# Altium PCB A40-C2G4A04S2a_3a_pad.pcbdoc
Units mm, origin at the board's own origin, x right, y up, seen from the top; angles counter-clockwise.
Board outline 46.36 x 43.94 mm, 2 copper layers (Top Layer, Bottom Layer); 1 components, 0 nets, 30 pads, 0 vias.
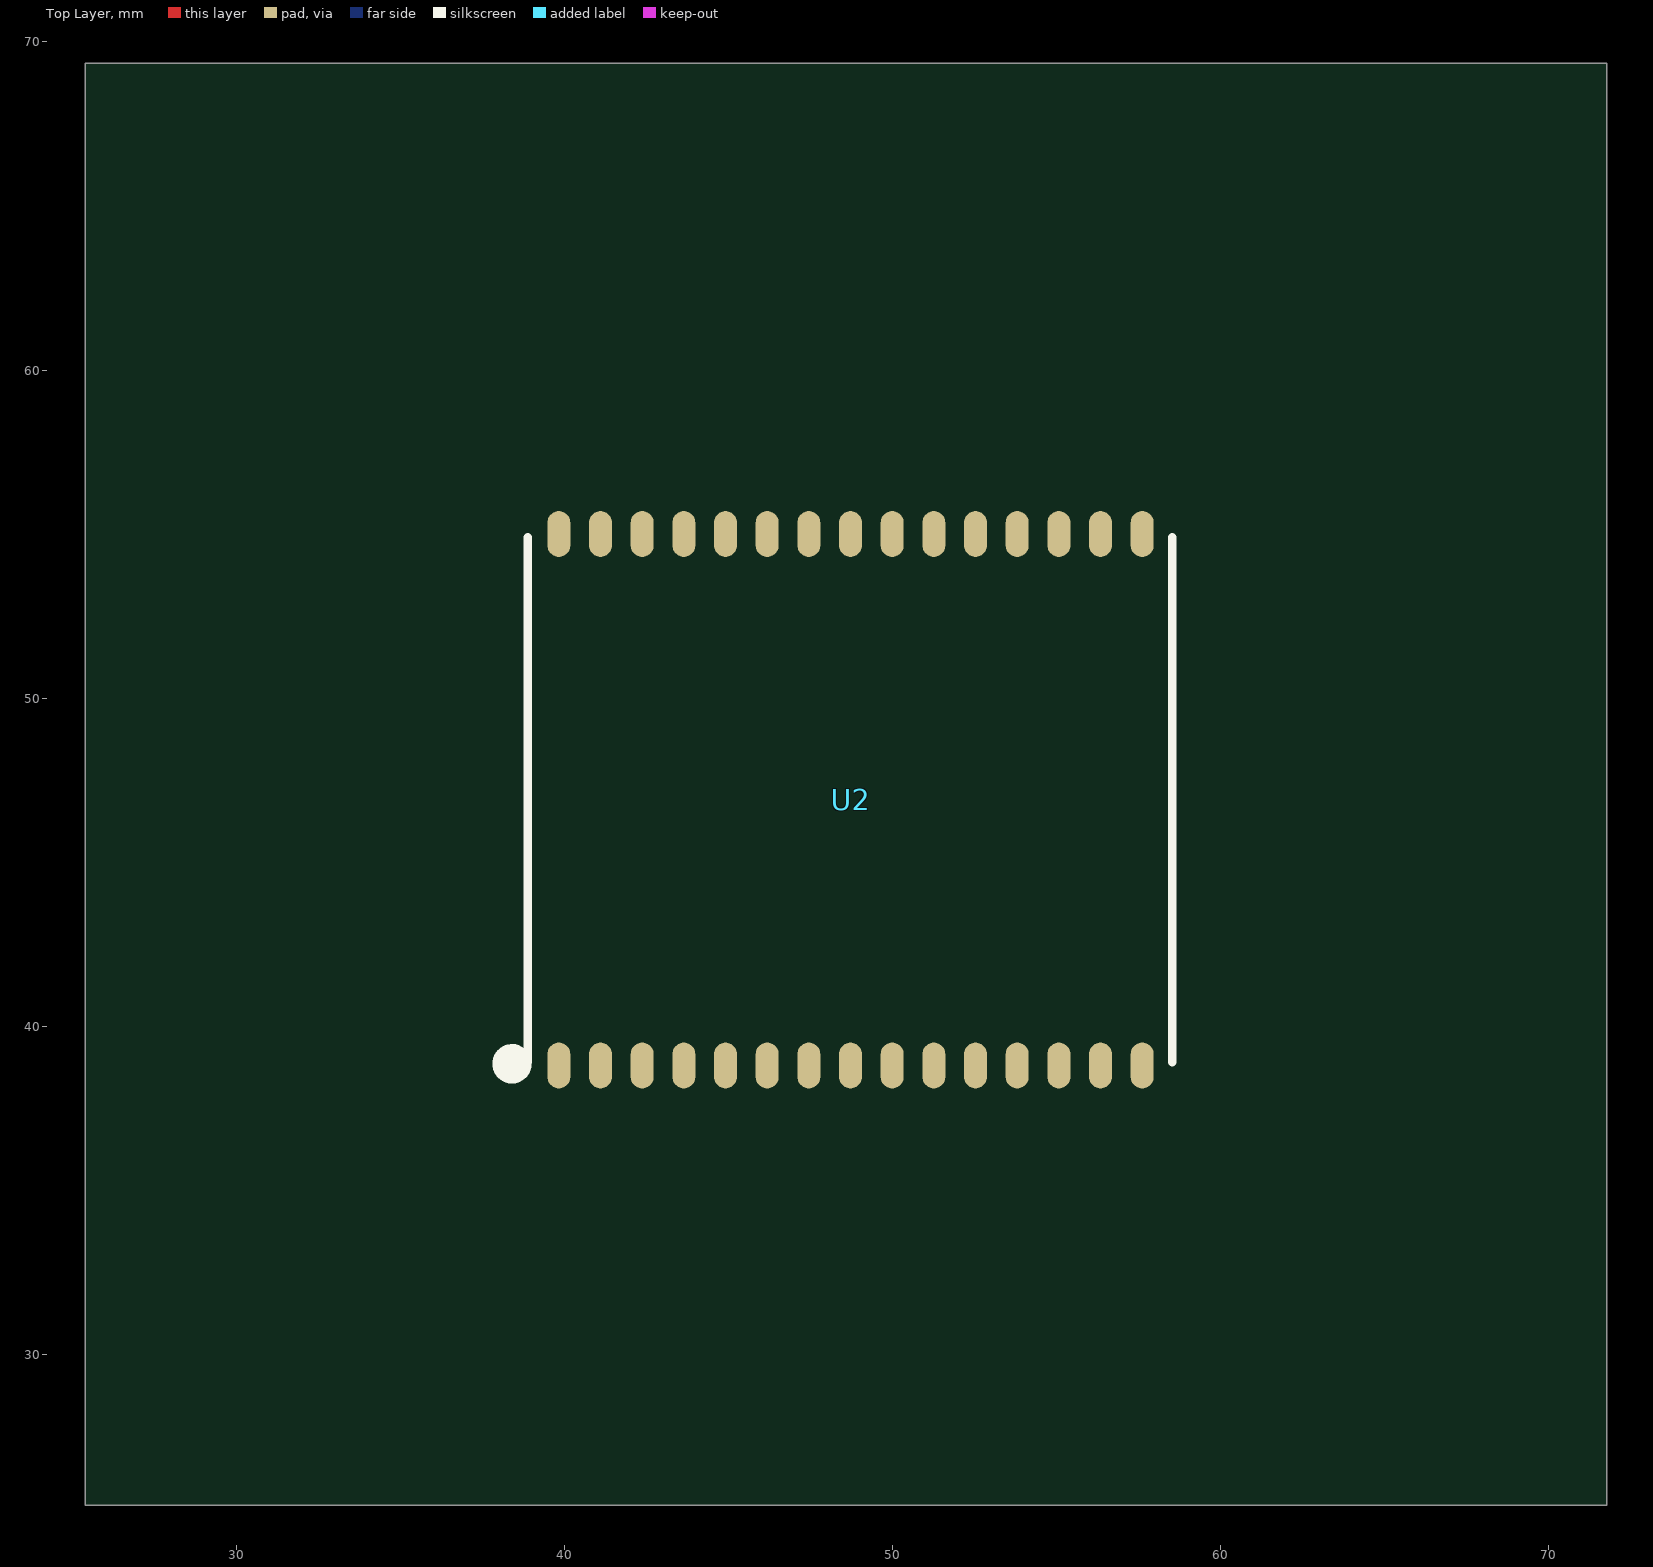
[diagram p0: Top Layer view]
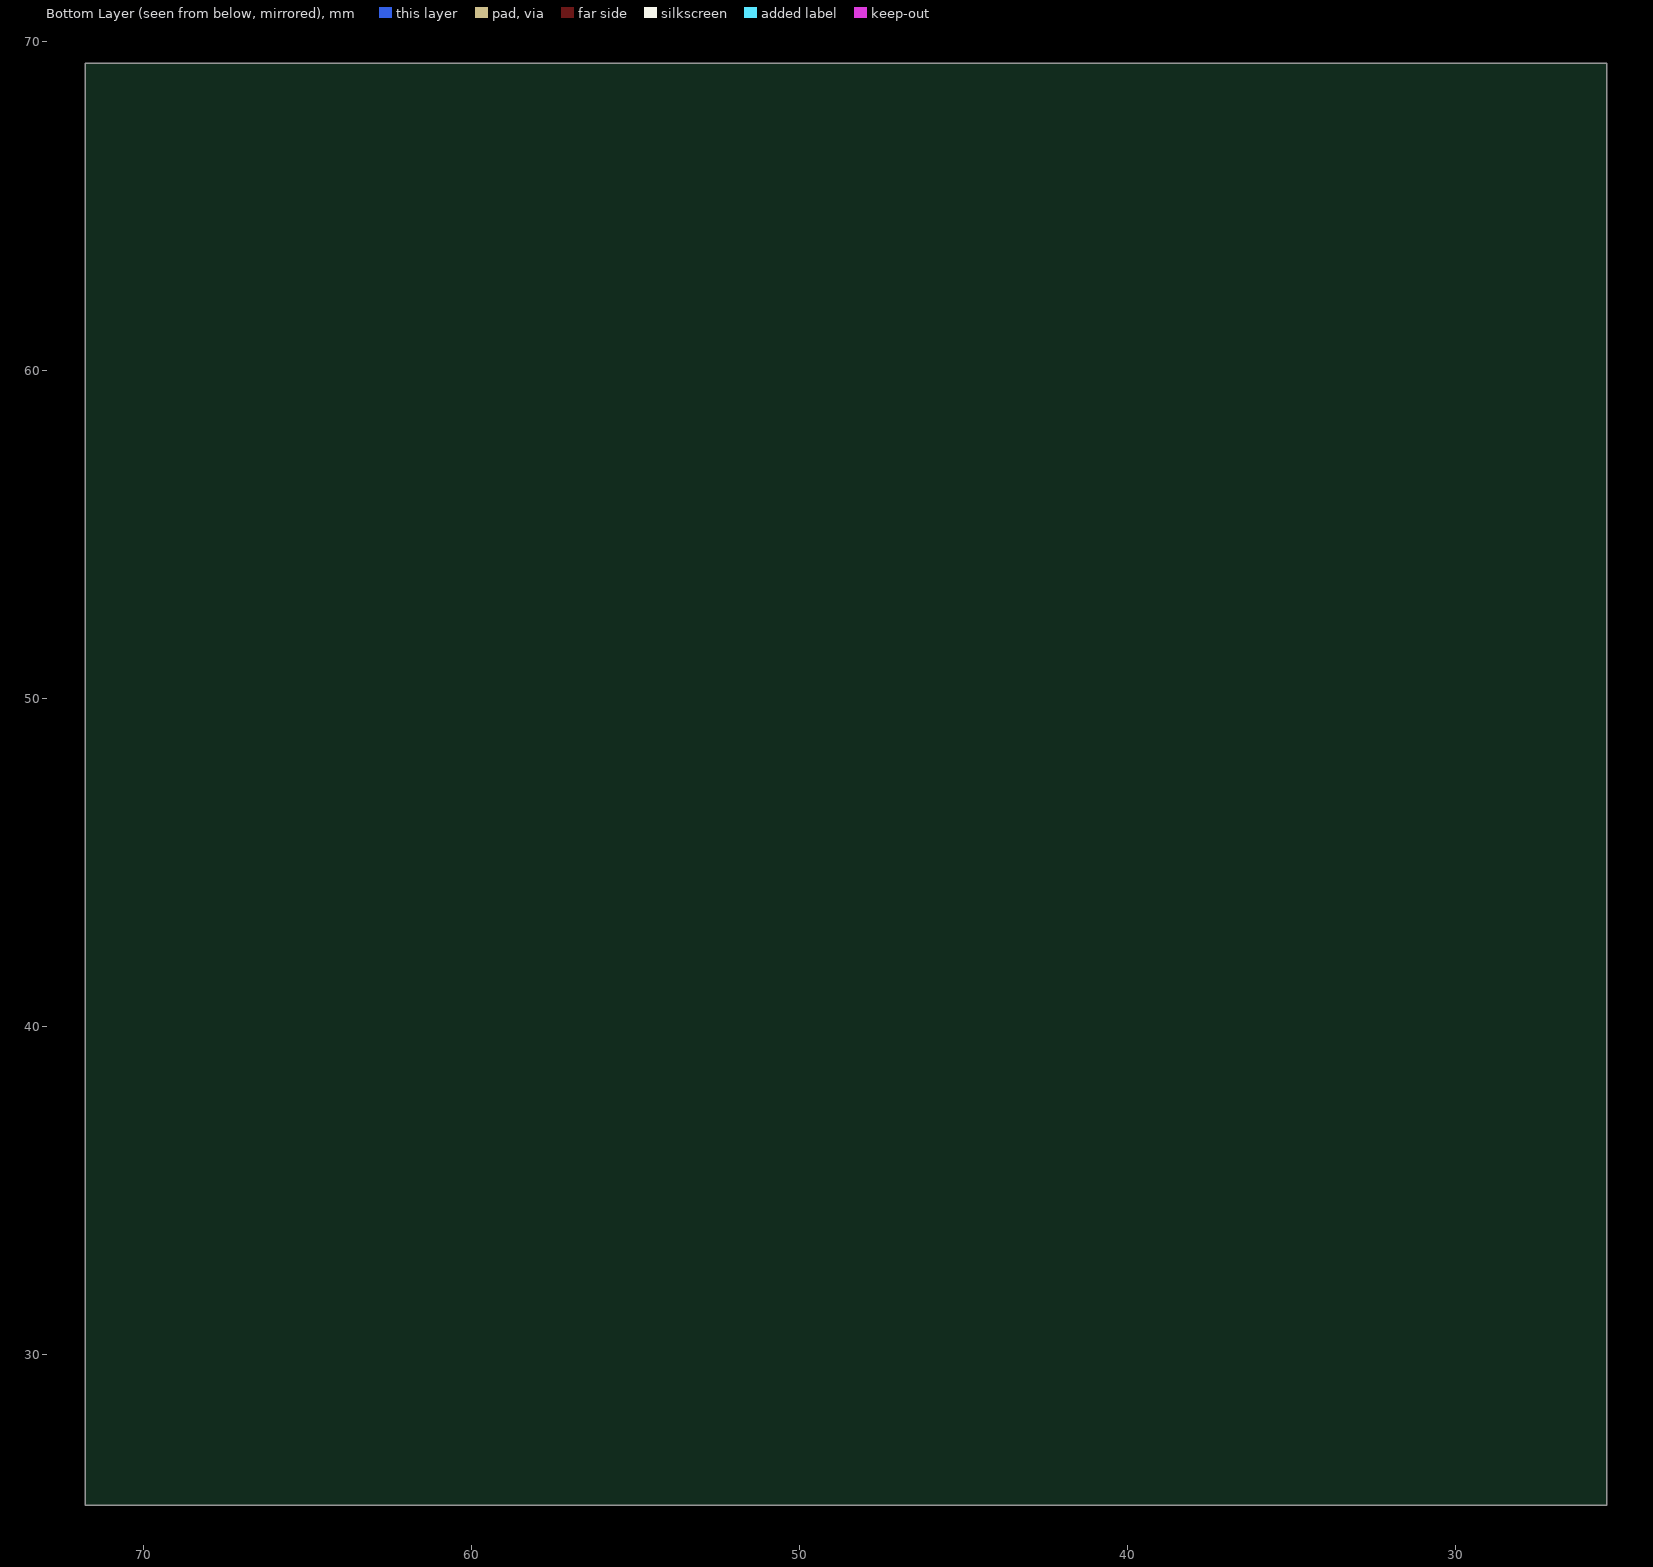
[diagram p1: Bottom Layer view, seen from below]

## Layer stack, top to bottom
Top Layer: signal copper (thickness not stored)
Dielectric: dielectric 0.32, FR-4, Dk 4.8
Bottom Layer: signal copper (thickness not stored)

## Board outline
71.76,25.4 25.4,25.4 25.4,69.343 71.76,69.343

## Components (designator, comment, footprint, x,y, rotation, side; value= is the part's Value field where it differs from the comment)
U2 "S23-PAD" S23-PAD 48.718,46.9 r0 top

## Footprints (in the part's own frame and the unit in brackets; to place one, negate y for a bottom-side part, rotate by r counter-clockwise, add the part's x,y. Pads: shape width x height; smd on the part's side, far side on the other; paste and mask are expansions set on the pad)
S23-PAD [mm]
  oval 0.7x1.4 smd: 1(-8.89,-8.1) 2(-7.62,-8.1) 3(-6.35,-8.1) 4(-5.08,-8.1) 5(-3.81,-8.1) 6(-2.54,-8.1) 7(-1.27,-8.1) 8(0,-8.1) 9(1.27,-8.1) 10(2.54,-8.1) 11(3.81,-8.1) 12(5.08,-8.1) 13(6.35,-8.1) 14(7.62,-8.1) 15(8.89,-8.1) 16(8.89,8.1) 17(7.62,8.1) 18(6.35,8.1) 19(5.08,8.1) 20(3.81,8.1) 21(2.54,8.1) 22(1.27,8.1) 23(0,8.1) 24(-1.27,8.1) 25(-2.54,8.1) 26(-3.81,8.1) 27(-5.08,8.1) 28(-6.35,8.1) 29(-7.62,8.1) 30(-8.89,8.1)
  silkscreen extent -10.62,-8.35 9.81,8

## Nets (pads, with @x,y where several pads share a name; then routed paths per layer and width w, separated by ;. In a path a pad name is that pad's centre, name@x,y a point inside that pad or via, vN(x,y) a via of type N, cw(c..) or ccw(c..) an arc to the next point about the centre after c; other vN are vias at no path point)
pads on no net: U2.1 U2.2 U2.3 U2.4 U2.5 U2.6 U2.7 U2.8 U2.9 U2.10 U2.11 U2.12 U2.13 U2.14 U2.15 U2.16 U2.17 U2.18 U2.19 U2.20 U2.21 U2.22 U2.23 U2.24 U2.25 U2.26 U2.27 U2.28 U2.29 U2.30

## Silkscreen, mask and mechanical layers (free items; w line width, h text height)
Document:
  lines w0.003: 48.555,47.346 48.605,47.397